# EAGLE board FRA_Sensor_v1 (EAGLE 7.6.0), part 1 of 2
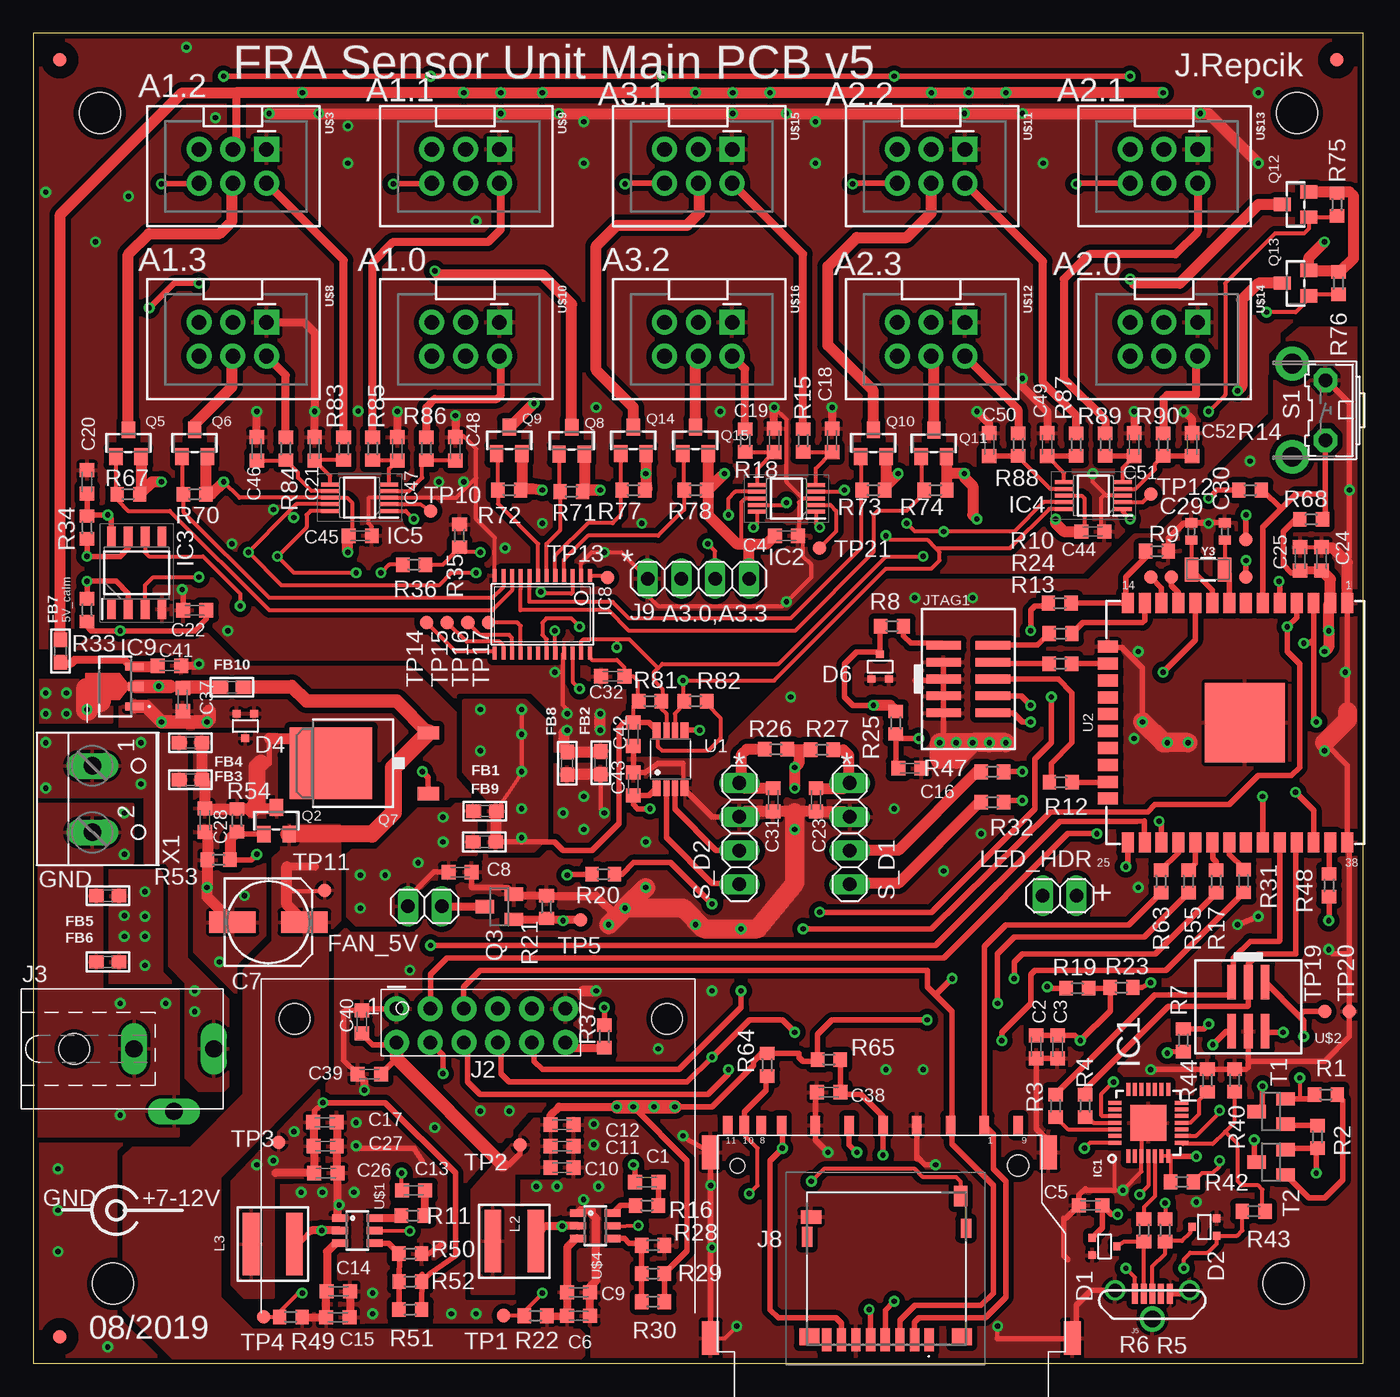
[diagram p0: board, top side]
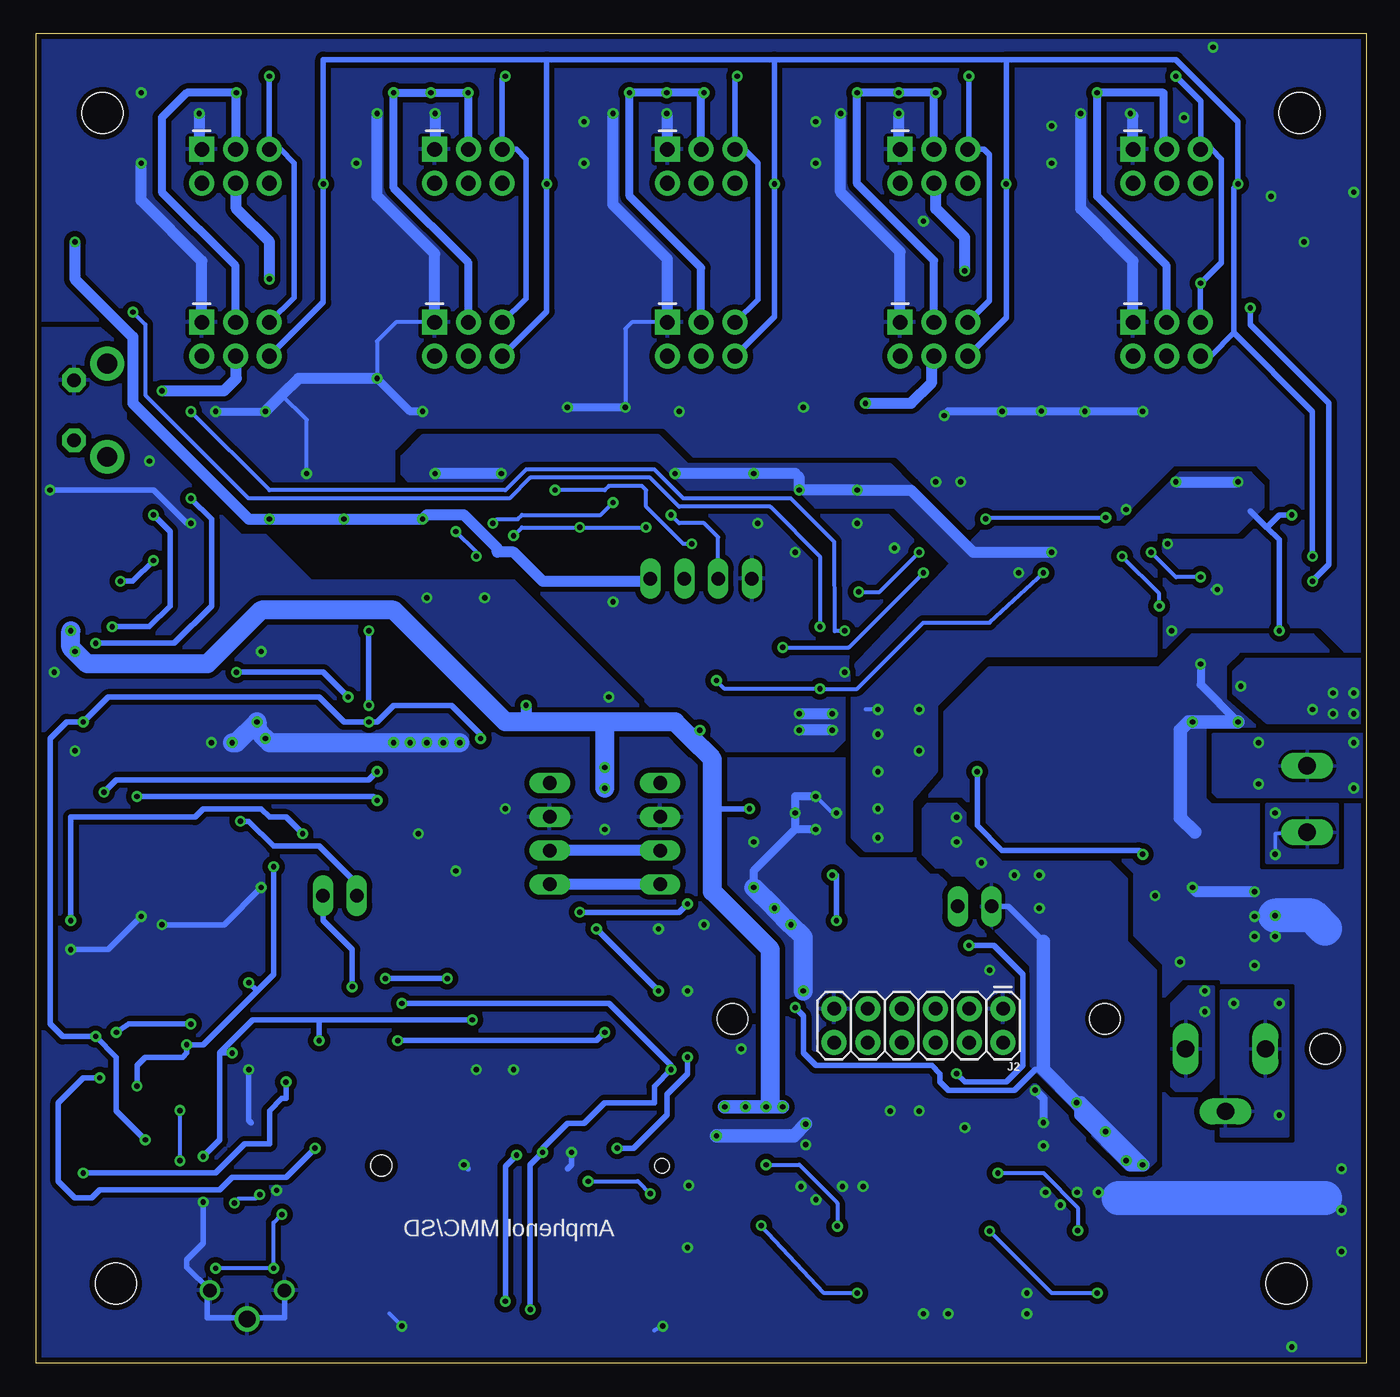
[diagram p1: board, bottom side, seen from below]

Size 100 x 100 mm. Coordinates in mm from the lower left corner, seen from the top.
Outline: 0,0 100,0 100,100 0,100 0,0
Copper layers (1*16): Top 0.035mm / dielectric 1.6mm / Bottom 0.035mm
Design rules "AllPCB": minimum track width 6mil, minimum drill 0.399mm, track to track 0.149859375mm, track to pad 0.149859375mm, pad to pad 8mil, via to via 17mil, smd to smd 6mil, copper to edge 10mil, drill to drill 24mil, minimum pad ring 10mil, minimum via ring 8mil, stop-mask expansion 4mil, vias tented up to drill 0.3mm, thermal gap 10mil
Holes 3.1 mm at 6,6 5,94 95,94 94,6
tKeepout: area 3.5,3.5 to 8.5,8.5; area 91.5,3.5 to 96.5,8.5; area 92.5,91.5 to 97.5,96.5; area 2.5,91.5 to 7.5,96.5; area 17.6,23.9 to 21.6,27.9; area 45.6,23.9 to 49.6,27.9
tRestrict: area 18.7,42.2 to 21.6,45.7

## Footprints (pad centres in the part's own frame; a part is rotated, then mirrored left to right if it is on the bottom)
C0603K = smd 1.05 x 1.08: 1 -0.875,0; 2 0.875,0
153CLV-0605 = smd 3.5 x 1.6: + 2.7,0; - -2.7,0
C0402 = smd 0.7 x 0.9: 1 -0.65,0; 2 0.65,0
SOT323-R = smd 0.6 x 0.55: 1 -0.65,-0.925; 2 0.65,-0.925; 3 0,0.925
1X02 = drill 1.016 long: 1 -1.27,0; 2 1.27,0
0603 = smd 1.1 x 1: 1 -0.85,0; 2 0.85,0
FIDUCIAL_1MM = smd 1 x 1: 1 0,0
MLP28 = smd 1 x 0.3: 1 -2.5,1.5; 2 -2.5,1; 3 -2.5,0.5; 4 -2.5,0; 5 -2.5,-0.5; 6 -2.5,-1; 7 -2.5,-1.5; 15 2.5,-1.5; 16 2.5,-1; 17 2.5,-0.5; 18 2.5,0; 19 2.5,0.5; 20 2.5,1; 21 2.5,1.5 | smd 0.3 x 1: 8 -1.5,-2.5; 9 -1,-2.5; 10 -0.5,-2.5; 11 0,-2.5; 12 0.5,-2.5; 13 1,-2.5; 14 1.5,-2.5; 22 1.5,2.5; 23 1,2.5; 24 0.5,2.5; 25 0,2.5; 26 -0.5,2.5; 27 -1,2.5; 28 -1.5,2.5 | smd 2.7 x 2.7: EXP 0,0
SOP50P490X110-10N = smd 1.4 x 0.3: 1 -2.2,1; 2 -2.2,0.5; 3 -2.2,0; 4 -2.2,-0.5; 5 -2.2,-1; 6 2.2,-1; 7 2.2,-0.5; 8 2.2,0; 9 2.2,0.5; 10 2.2,1
SOIC127P600X175-8N = smd 1.528 x 0.65: 1 -2.711,1.905; 2 -2.711,0.635; 3 -2.711,-0.635; 4 -2.711,-1.905; 5 2.711,-1.905; 6 2.711,-0.635; 7 2.711,0.635; 8 2.711,1.905
TSSOP24 = smd 0.305 x 0.991: 1 -3.575,-2.918; 2 -2.925,-2.918; 3 -2.275,-2.918; 4 -1.625,-2.918; 5 -0.975,-2.918; 6 -0.325,-2.918; 7 0.325,-2.918; 8 0.975,-2.918; 9 1.625,-2.918; 10 2.275,-2.918; 11 2.925,-2.918; 12 3.575,-2.918; 13 3.575,2.918; 14 2.925,2.918; 15 2.275,2.918; 16 1.625,2.918; 17 0.975,2.918; 18 0.325,2.918; 19 -0.325,2.918; 20 -0.975,2.918; 21 -1.625,2.918; 22 -2.275,2.918; 23 -2.925,2.918; 24 -3.575,2.918
ST-SOT-89 = smd 0.57 x 1.4: 1 -1.5,-1.475; 3 1.5,-1.475 | smd 0.65 x 1.2: 2 0,-1.575
2X6 = drill 1.016 pad 1.88: 1 0,0; 2 0,2.54; 3 2.54,0; 4 2.54,2.54; 5 5.08,0; 6 5.08,2.54; 7 7.62,0; 8 7.62,2.54; 9 10.16,0; 10 10.16,2.54; 11 12.7,0; 12 12.7,2.54
PJ-059A = drill 1.3 pad 1.8 long: 1 3,0; 2 -3,0; 3 0,-4.7 | hole 2.3: -7.5,0
SDCMF-10915W010 = smd 0.711 x 1.422: 1 7.366,13.462; 2 4.826,13.462; 3 2.286,13.462; 4 -0.254,13.462; 5 -2.794,13.462; 6 -5.334,13.462; 7 -7.874,13.462; 8 -9.398,13.462; 9 9.906,13.462; 10 -10.668,13.462; 11 -11.938,13.462 | smd 1.27 x 2.54: M1 12.192,11.43; M2 13.97,-2.54; M3 -13.208,-2.54; M4 -13.208,11.43 | hole 1.6: 9.906,10.414 | hole 1.1: -11.176,10.414
USB-B-MICRO-SMD_VERT = smd 0.45 x 1.5: D+ 0,0; D- -0.65,0; GND 1.3,0; ID 0.65,0; VBUS -1.3,0 | drill 1.016: P1 -2.8,0.25; P2 2.8,0.25 | drill 1.27: P3 0,-1.9
1140084168 = smd 0.7 x 1.75: 1 3.275,-5.35; 2 2.175,-5.35; 3 1.075,-5.35; 4 -0.025,-5.35; 5 -1.125,-5.35; 6 -2.225,-5.35; 7 -3.325,-5.35; 8 -4.425,-5.35 | smd 1.5 x 1.3: 9 -5.725,-5.125; 10 5.725,-5.125 | smd 0.8 x 1.5: 11 -5.9,2.375 | smd 0.8 x 1.4: 12 6.05,3.025 | smd 1.55 x 1: CD1 -5.6,3.875 | smd 1 x 1.55: CD2 5.65,5.45
1X04 = drill 1.016 long: 1 -3.81,0; 2 -1.27,0; 3 1.27,0; 4 3.81,0
2X05_1.27MM_SMT = smd 0.65 x 2.6: 1 -2.54,-1.85; 2 -2.54,1.85; 3 -1.27,-1.85; 4 -1.27,1.85; 5 0,-1.85; 6 0,1.85; 7 1.27,-1.85; 8 1.27,1.85; 9 2.54,-1.85; 10 2.54,1.85
SRP5030CA = smd 1.25 x 4.7: P$1 -1.625,0; P$2 1.625,0
SOT23-WIDE = smd 1 x 1.27: 1 -0.95,-1; 2 0.95,-1; 3 0,1
SOT23 = smd 1 x 1.4: 1 -0.95,-1.1; 2 0.95,-1.1; 3 0,1.1
TO252 = smd 1 x 1.6: 1 -2.28,-4.8; 2 2.28,-4.8 | smd 5.4 x 6.2: 3 0,2.5
R0603 = smd 1 x 1.1: 1 -0.85,0; 2 0.85,0
B3F-31XX = drill 1.016 pad 1.778 octagon: 1 -2.261,-1.245; 2 2.261,-1.245 | drill 1.499 pad 2.54: 3 -3.505,1.245; 4 3.505,1.245
TP10R = smd 1 x 1: TP 0,0
SOT505-1 = smd 0.6 x 1.15: 1 -1.05,-2.175; 4 1.05,-2.175; 5 1.05,2.175; 8 -1.05,2.175 | smd 0.45 x 1.15: 2 -0.325,-2.175; 3 0.325,-2.175; 6 0.325,2.175; 7 -0.325,2.175
ESP-WROOM-32 = smd 0.9 x 1.5: 1 7.7,9; 2 6.43,9; 3 5.16,9; 4 3.89,9; 5 2.62,9; 6 1.35,9; 7 0.08,9; 8 -1.19,9; 9 -2.46,9; 10 -3.73,9; 11 -5,9; 12 -6.27,9; 13 -7.54,9; 14 -8.81,9; 25 -8.81,-9; 26 -7.54,-9; 27 -6.27,-9; 28 -5,-9; 29 -3.73,-9; 30 -2.46,-9; 31 -1.19,-9; 32 0.08,-9; 33 1.35,-9; 34 2.62,-9; 35 3.89,-9; 36 5.16,-9; 37 6.43,-9; 38 7.7,-9 | smd 1.5 x 0.9: 15 -10.3,5.715; 16 -10.3,4.445; 17 -10.3,3.175; 18 -10.3,1.905; 19 -10.3,0.635; 20 -10.3,-0.635; 21 -10.3,-1.905; 22 -10.3,-3.175; 23 -10.3,-4.445; 24 -10.3,-5.715 | smd 6 x 6: GND 0,0
SOT23-6 = smd 0.55 x 1.2: 1 -0.95,-1.3; 2 0,-1.3; 3 0.95,-1.3; 4 0.95,1.3; 5 0,1.3; 6 -0.95,1.3
2X03_1.27MM_SMT = smd 0.65 x 2.6: 1 -1.27,-1.85; 2 -1.27,1.85; 3 0,-1.85; 4 0,1.85; 5 1.27,-1.85; 6 1.27,1.85
WE_61200621621 = drill 1.1 pad 1.88 square: 1 -1.27,2.54 | drill 1.1 pad 1.88: 2 1.27,2.54; 3 -1.27,0; 4 1.27,0; 5 -1.27,-2.54; 6 1.27,-2.54
ETH_MODULE_OUTLINE_SMALL = hole 2.3: 2.5,47.5; 30.5,47.5
W237-102 = drill 1.3 long: 1 -2.5,-1.27; 2 2.5,-1.27
CRYSTAL-SMD-3.2X1.5MM = smd 1 x 1.8: P$1 -1.25,0; P$2 1.25,0

## Placement (x,y rotation side)
C1  100n  [C0603K]  46.13,13.64 180 top
C2  10u  [C0603K]  75.41,23.8 270 top
C3  100n  [C0603K]  77.01,23.8 270 top
C4  100n  [C0603K]  56.63,62.23 0 top
C5  100n  [C0603K]  79.5,11.89 180 top
C6  10u/25V  [C0603K]  41,3.58 0 top
C7  220u/25V  [153CLV-0605]  17.68,33.17 0 top
C8  10u  [C0603K]  32.09,36.93 0 top
C9  100n  [C0603K]  41,5.35 0 top
C10  10u/25V  [C0603K]  39.75,14.73 0 top
C11  10u  [C0603K]  39.75,16.34 0 top
C12  100n  [C0603K]  39.75,17.95 0 top
C13  100n  [C0603K]  28.59,13.02 180 top
C14  10u/25V  [C0603K]  22.94,5.42 0 top
C15  100n  [C0603K]  22.9,3.47 0 top
C16  100n  [C0603K]  65.91,44.74 0 top
C17  10u  [C0603K]  21.93,18.13 0 top
C18  100n  [C0603K]  60.05,69.39 90 top
C19  DNI  [C0603K]  55.7,69.39 90 top
C20  10u  [C0603K]  4.04,66.27 90 top
C21  100n  [C0603K]  21.16,68.76 90 top
C22  100n  [C0603K]  12.13,56.63 180 top
C23  100n  [C0603K]  58.84,42.37 270 top
C24  10u  [C0603K]  96.86,60.49 90 top
C25  10u  [C0603K]  95.24,60.49 90 top
C26  10u  [C0603K]  22.01,14.31 0 top
C27  100n  [C0603K]  21.95,16.34 0 top
C28  100n  [C0603K]  12.9,40.83 270 top
C29  DNI  [C0402]  87.05,62.55 90 top
C30  DNI  [C0402]  89.59,62.55 90 top
C31  100n  [C0603K]  55.63,42.37 270 top
C32  100n  [C0603K]  43.56,51.65 180 top
C37  10u/25V  [C0603K]  11.24,49.92 270 top
C38  100n  [C0603K]  59.8,20.39 180 top
C39  10u  [C0603K]  25.26,21.75 180 top
C40  100n  [C0603K]  24.71,25.67 90 top
C41  10u  [C0603K]  10.23,52.45 0 top
C42  100n  [C0603K]  45.12,47.29 270 top
C43  100n  [C0603K]  45.12,43.56 90 top
C44  100n  [C0603K]  79.65,62.54 0 top
C45  100n  [C0603K]  24.58,62.23 0 top
C46  100n  [C0603K]  16.8,68.76 90 top
C47  100n  [C0603K]  27.38,68.76 90 top
C48  100n  [C0603K]  31.74,68.76 90 top
C49  100n  [C0603K]  76.23,69.08 90 top
C50  100n  [C0603K]  71.88,69.08 90 top
C51  100n  [C0603K]  82.77,69.08 90 top
C52  100n  [C0603K]  87.12,69.08 90 top
D1  PESD1CANSC70  [SOT323-R]  80.54,8.8 270 top
D2  PESD1CANSC70  [SOT323-R]  88.04,10.25 90 top
D4  PESD1CANSC70  [SOT323-R]  15.94,47.92 180 top
D6  PESD1CANSC70  [SOT323-R]  63.67,52.38 0 top
DRILEGEND  [DRILEGEND]  -2.41,-26.42 0 top  (outside the outline)
FAN_5V  2pin  [1X02]  29.44,34.36 180 top
FB1  [0603]  33.95,41.52 0 top
FB2  [0603]  42.67,45.15 90 top
FB3  [0603]  11.82,43.87 0 top
FB4  [0603]  11.82,46.67 0 top
FB5  [0603]  5.6,35.16 0 top
FB6  [0603]  5.6,30.18 0 top
FB7  [0603]  2.04,53.56 90 top
FB8  [0603]  40.14,45.12 90 top
FB9  [0603]  33.92,39.2 0 top
FB10  [0603]  14.94,50.84 180 top
FID1  FIDUCIAL""  [FIDUCIAL_1MM]  2,98 0 top
FID2  FIDUCIAL""  [FIDUCIAL_1MM]  98,98 0 top
FID4  FIDUCIAL""  [FIDUCIAL_1MM]  2,2 0 top
IC1  CP2101  [MLP28]  83.82,18.1 90 top
IC2  ADS1115IDGSR  [SOP50P490X110-10N]  56.63,65.03 180 top
IC3  P82B715DR  [SOIC127P600X175-8N]  7.78,59.43 90 top
IC4  ADS1115IDGSR  [SOP50P490X110-10N]  79.7,65.24 180 top
IC5  ADS1115IDGSR  [SOP50P490X110-10N]  24.54,65.09 180 top
IC8  PCA9555PW  [TSSOP24]  38.27,56.32 180 top
IC9  LDK320ADU50R  [ST-SOT-89]  6.15,50.89 90 top
J2  ETH_CONN  [2X6]  27.3,26.67 180 bottom
J3  PJ-059A  [PJ-059A]  10.58,23.65 0 top
J4  DNI  [SDCMF-10915W010]  64.14,4.45 0 top
J5  WM9734TR-ND  [USB-B-MICRO-SMD_VERT]  84.13,5.24 0 top
J8  1140084168  [1140084168]  64.08,7.13 0 top
J9  4pin  [1X04]  50,59 0 top
JTAG1  DNI  [2X05_1.27MM_SMT]  70.29,51.45 270 top
L2  SRP5030CA-1R5M  [SRP5030CA]  36.17,9.18 180 top
L3  SRP5030CA-1R5M  [SRP5030CA]  18.01,8.97 180 top
LED_HDR  2pin  [1X02]  77.17,35.16 0 top
Q2  FDN306P  [SOT23-WIDE]  18.28,40.79 0 top
Q3  Si2300DS  [SOT23]  35.04,34.33 90 top
Q5  FDN306P  [SOT23-WIDE]  7.16,69.19 0 top
Q6  FDN306P  [SOT23-WIDE]  12.13,69.19 0 top
Q7  DNI  [TO252]  24.89,45.12 90 top
Q8  FDN306P  [SOT23-WIDE]  40.48,69.37 0 top
Q9  FDN306P  [SOT23-WIDE]  35.78,69.39 0 top
Q10  FDN306P  [SOT23-WIDE]  63.16,69.19 0 top
Q11  FDN306P  [SOT23-WIDE]  67.71,69.17 0 top
Q12  FDN306P  [SOT23-WIDE]  94.9,87.12 90 top
Q13  FDN306P  [SOT23-WIDE]  94.9,81.21 90 top
Q14  FDN306P  [SOT23-WIDE]  45.12,69.39 0 top
Q15  FDN306P  [SOT23-WIDE]  49.78,69.39 0 top
R1  12k  [R0603]  97.18,20.21 180 top
R2  12k  [R0603]  96.55,17.04 270 top
R3  100  [R0603]  76.85,19.37 270 top
R4  0  [R0603]  79.06,19.37 270 top
R5  0  [R0603]  85.08,10 90 top
R6  0  [R0603]  83.49,10 90 top
R7  0  [R0603]  86.46,24.29 90 top
R8  0  [R0603]  64.57,55.43 180 top
R9  100k  [R0603]  84.48,61.07 0 top
R10  100  [R0603]  77.17,57.16 0 top
R11  0  [R0603]  28.53,11.13 180 top
R12  100  [R0603]  77.24,43.69 0 top
R13  100  [R0603]  77.22,52.6 0 top
R14  DNI  [R0603]  91.48,65.65 0 top
R15  10k  [R0603]  57.87,69.39 90 top
R16  0  [R0603]  46.13,11.87 180 top
R17  47  [R0603]  88.93,36.23 270 top
R18  10k  [R0603]  53.52,69.39 90 top
R19  100  [R0603]  78.49,28.2 0 top
R20  47  [R0603]  42.86,36.78 180 top
R21  100k  [R0603]  38.59,34.31 90 top
R22  10k  [R0603]  37.76,3.58 0 top
R23  DNI  [R0603]  81.82,28.27 0 top
R24  100  [R0603]  77.23,54.87 0 top
R25  10k  [R0603]  64.84,48.16 90 top
R26  10  [R0603]  55.84,46.17 180 top
R27  10  [R0603]  59.29,46.13 0 top
R28  10k/1%  [R0603]  46.6,8.88 0 top
R29  DNI  [R0603]  46.6,6.76 0 top
R30  45.3k  [R0603]  46.6,4.64 0 top
R31  47  [R0603]  90.99,36.26 270 top
R32  0  [R0603]  72.11,42.19 180 top
R33  330  [R0603]  4.04,56.63 90 top
R34  330  [R0603]  4.04,62.85 270 top
R35  0  [R0603]  32.05,62.23 90 top
R36  DNI  [R0603]  28.63,60.05 0 top
R37  DNI  [R0603]  42.94,24.58 90 top
R40  DNI  [R0603]  88.27,21.27 270 top
R42  10k  [R0603]  86.36,13.65 0 top
R43  0  [R0603]  91.75,11.44 180 top
R44  DNI  [R0603]  90.33,21.29 270 top
R47  0  [R0603]  72.11,44.47 180 top
R48  47  [R0603]  97.42,35.95 270 top
R49  10k  [R0603]  19.37,3.49 0 top
R50  10k/1%  [R0603]  28.35,8.25 0 top
R51  DNI  [R0603]  28.34,4.05 0 top
R52  73.2k  [R0603]  28.35,6.17 0 top
R53  100k  [R0603]  13.94,37.87 180 top
R54  100k  [R0603]  15.32,40.83 270 top
R55  47  [R0603]  86.85,36.23 270 top
R63  47  [R0603]  84.78,36.23 270 top
R64  10k  [R0603]  55.18,22.45 90 top
R65  0  [R0603]  59.82,22.84 180 top
R67  10k  [R0603]  7.16,65.34 180 top
R68  10k  [R0603]  96.07,63.46 180 top
R70  10k  [R0603]  12.13,65.34 180 top
R71  10k  [R0603]  40.45,65.54 180 top
R72  10k  [R0603]  35.78,65.65 180 top
R73  10k  [R0603]  63.16,65.65 180 top
R74  10k  [R0603]  67.83,65.65 180 top
R75  10k  [R0603]  98.01,87.12 270 top
R76  10k  [R0603]  98.12,81.21 270 top
R77  10k  [R0603]  45.12,65.65 180 top
R78  10k  [R0603]  49.78,65.65 180 top
R81  2k2  [R0603]  46.36,49.78 0 top
R82  2k2  [R0603]  49.78,49.78 180 top
R83  10k  [R0603]  23.34,68.76 90 top
R84  10k  [R0603]  18.98,68.76 90 top
R85  10k  [R0603]  25.51,68.76 90 top
R86  10k  [R0603]  29.56,68.76 90 top
R87  10k  [R0603]  78.41,69.08 90 top
R88  10k  [R0603]  74.05,69.08 90 top
R89  10k  [R0603]  80.59,69.08 90 top
R90  10k  [R0603]  84.94,69.08 90 top
S1  [B3F-31XX]  95.9,71.66 90 top
S_D1  4pin  [1X04]  61.38,39.83 270 top
S_D2  4pin  [1X04]  53.09,39.83 270 top
T1  BC847  [SOT23]  93.05,18.94 90 top
T2  BC847  [SOT23]  93.05,15.13 90 top
TP1  TPTP10R  [TP10R]  35.38,3.6 0 top
TP2  TPTP10R  [TP10R]  36.61,16.43 0 top
TP3  TPTP10R  [TP10R]  18.46,16.63 0 top
TP4  TPTP10R  [TP10R]  17.32,3.52 0 top
TP5  TPTP10R  [TP10R]  41.15,33.34 0 top
TP6  TPTP10R  [TP10R]  91.17,59.12 0 top
TP7  TPTP10R  [TP10R]  91.17,61.92 0 top
TP8  TPTP10R  [TP10R]  85.57,59.12 0 top
TP9  TPTP10R  [TP10R]  84.01,59.12 0 top
TP10  TPTP10R  [TP10R]  29.87,64.1 0 top
TP11  TPTP10R  [TP10R]  21.9,35.56 0 top
TP12  TPTP10R  [TP10R]  84.01,65.34 0 top
TP13  TPTP10R  [TP10R]  43.16,59.07 0 top
TP14  TPTP10R  [TP10R]  29.56,55.7 0 top
TP15  TPTP10R  [TP10R]  31.11,55.7 0 top
TP16  TPTP10R  [TP10R]  32.67,55.7 0 top
TP17  TPTP10R  [TP10R]  34.23,55.7 0 top
TP19  TPTP10R  [TP10R]  97.08,26.45 0 top
TP20  TPTP10R  [TP10R]  98.95,26.45 0 top
TP21  TPTP10R  [TP10R]  59.12,61.3 0 top
U1  PCA9509DP  [SOT505-1]  47.92,45.43 0 top
U2  ESP-WROOM-32  [ESP-WROOM-32]  91.09,48.17 0 top
U$1  TPS563249DDCR  [SOT23-6]  24.36,9.99 270 top
U$2  DNI  [2X03_1.27MM_SMT]  91.34,26.82 180 top
U$3  CONN_03X2_WE_61200621621  [WE_61200621621]  15,90 270 top
U$4  TPS563249DDCR  [SOT23-6]  42.26,10.34 270 top
U$7  ETH_MODULE_OUTLINE  [ETH_MODULE_OUTLINE_SMALL]  17.14,-21.59 0 top
U$8  CONN_03X2_WE_61200621621  [WE_61200621621]  15,77 270 top
U$9  CONN_03X2_WE_61200621621  [WE_61200621621]  32.5,90 270 top
U$10  CONN_03X2_WE_61200621621  [WE_61200621621]  32.5,77 270 top
U$11  CONN_03X2_WE_61200621621  [WE_61200621621]  67.5,90 270 top
U$12  CONN_03X2_WE_61200621621  [WE_61200621621]  67.5,77 270 top
U$13  CONN_03X2_WE_61200621621  [WE_61200621621]  85,90 270 top
U$14  CONN_03X2_WE_61200621621  [WE_61200621621]  85,77 270 top
U$15  CONN_03X2_WE_61200621621  [WE_61200621621]  50,90 270 top
U$16  CONN_03X2_WE_61200621621  [WE_61200621621]  50,77 270 top
X1  TB001-500-02BE  [W237-102]  5.71,42.43 270 top
Y3  DNI  [CRYSTAL-SMD-3.2X1.5MM]  88.32,59.69 0 top

## Library data of the parts
C1 C3-C5 C9 C12 C13 C15 C16 C18 C19 C21-C23 C27 C28 C31 C32 C38 C40 C42-C52 = resistor; PARTNO: CC0603KRX7R8BB104
C2 C8 C11 C17 C20 C24-C26 C39 C41 = resistor; PARTNO: GRM188R61A106KE69J
C6 C10 C14 C37 = resistor; PARTNO: GRM188R61E106KA73J
C7 = resistor; PARTNO: EMZR250ARA221MF80G
C29 C30 = resistor; PARTNO: C0402C220J5GAC7411
D1 D2 D4 D6 = diode; PARTNO: PESD1CAN-UX
DRILEGEND = drilegend
FAN_5V LED_HDR = pinhead; PARTNO: TSW-102-07-G-S
FB1-FB10 = microbuilder; PARTNO: BLM18PG121SN1D
FID1 FID2 FID4 Q7 = microbuilder
IC1 = SparkFun-Retired; PARTNO: CP2101-GM; PROD_ID: COM-00310
IC2 IC4 IC5 = SamacSys_Parts; DESCRIPTION: Automotive 16-Bit 860SPS 4-Ch Delta-Sigma ADC With PGA, Oscillator, VREF, Comparator, and I2C; HEIGHT: 1.1mm; MANUFACTURER_NAME: Texas Instruments; MANUFACTURER_PART_NUMBER: ADS1115BQDGSRQ1; MOUSER_PART_NUMBER: 595-ADS1115BQDGSRQ1; MOUSER_PRICE-STOCK: https://www.mouser.com/Search/Refine.aspx?Keyword=595-ADS1115BQDGSRQ1; PARTNO: ADS1115IDGSR
IC3 = SamacSys_Parts; DESCRIPTION: I2C Bus Extender; HEIGHT: 1.75mm; MANUFACTURER_NAME: Texas Instruments; MANUFACTURER_PART_NUMBER: P82B715DR; PARTNO: P82B715DR
IC8 = micro-philips; MPN: PCA9555PW; OC_FARNELL: 1408297; OC_NEWARK: 63K6069; PARTNO: PCA9555PW,118
IC9 = SamacSys_Parts; DESCRIPTION: LDO Voltage Regulators 200 mA low quiescent current and high PSRR voltage regulator; HEIGHT: mm; MANUFACTURER_NAME: STMicroelectronics; MANUFACTURER_PART_NUMBER: LDK320ADU50R; MOUSER_PART_NUMBER: 511-LDK320ADU50R; MOUSER_PRICE-STOCK: https://www.mouser.com/Search/Refine.aspx?Keyword=511-LDK320ADU50R; PARTNO: LDK320ADU50R
J2 = SparkFun-Connectors; PARTNO: CES-106-01-T-D; PROD_ID: CONN-12423
J3 = FRA_eagle_lib; DESCRIPTION: DC Power Connectors Power Jacks; HEIGHT: 11mm; MANUFACTURER_NAME: CUI; MANUFACTURER_PART_NUMBER: PJ-059A; MOUSER_PRICE-STOCK: https://www.mouser.com/ProductDetail/CUI/PJ-059A?qs=sGAEpiMZZMtnOp%252BbbqA009lE0K0K%252BPZGgL2j%2Fo1XCBQtBpzQrCB9dQ%3D%3D; PARTNO: PJ-059A
J4 = sd-mmc; PARTNO: GSD090012SEU
J5 = SparkFun-Connectors; PARTNO: 105133-0001; PROD_ID: CONN-13534
J8 = SamacSys_Parts; DESCRIPTION: Memory Card Connectors Micro SD 8 Pin PCB Gold; HEIGHT: 1.68mm; MANUFACTURER_NAME: Amphenol; MANUFACTURER_PART_NUMBER: 1140084168; MOUSER_PART_NUMBER: 523-114-00841-68; PARTNO: 1140084168
J9 S_D1 S_D2 = pinhead; PARTNO: 61300411121
JTAG1 = microbuilder; PARTNO: M50-3600542R
L2 L3 = FRA_eagle_lib; PARTNO: SRP5030CA-1R5M
Q2 Q5 Q6 Q8-Q15 = microbuilder; PARTNO: FDN306P
Q3 = adafruit; PARTNO: SI2300DS-T1-GE3
R1 R2 = resistor; PARTNO: RC0603FR-0712KL
R3 R10 R12 R13 R19 R24 = resistor; PARTNO: CRCW0603100RFKEAC
R4-R8 R11 R14 R16 R23 R32 R35 R37 R40 R43 R44 R47 R65 = resistor; PARTNO: CRCW06030000Z0EAC
R9 R21 R53 R54 = resistor; PARTNO: CRCW0603100KFKEAC
R15 R18 R22 R25 R42 R49 R64 R67 R68 R70-R78 R83-R90 = resistor; PARTNO: CRCW060310K0JNEAC
R17 R20 R31 R48 R55 R63 = resistor; PARTNO: CRCW060347R0FKEAC
R26 R27 = resistor; PARTNO: CRCW060310R0FKEAC
R28 R50 = resistor; PARTNO: RN73R1JTTD1002D25
R29 R51 = resistor
R30 = resistor; PARTNO: ERJ-PB3D4532V
R33 R34 R36 = resistor; PARTNO: CRCW0603330RFKEAC
R52 = resistor; PARTNO: ERJ-PB3D7322V
R81 R82 = resistor; PARTNO: RCS06032K20JNEA
S1 = adafruit; PARTNO: FSMRA5JH
T1 T2 = transistor-neu-to92; PARTNO: BC847A-TP
TP1-TP17 TP19-TP21 = testpad
U1 = nxp_60; PARTNO: PCA9509DP,118
U2 = SparkFun-RF; PARTNO: ESP32-WROOM-32; PROD_ID: IC-13849
U$1 U$4 = FRA_eagle_lib; PARTNO: TPS563249DDCR
U$2 = FRA_eagle_lib; PARTNO: HTMS-103-03-T-D-SM
U$3 U$8-U$16 = FRA_eagle_lib; PARTNO: 61200621621
U$7 = FRA_eagle_lib
X1 = con-wago-500; MPN: 237-102; OC_FARNELL: unknown; OC_NEWARK: 70K9898; PARTNO: TB001-500-02BE
Y3 = SparkFun-Clocks; PARTNO: FC-135 32.7680KA-A3; PROD_ID: XTAL-13062

## Nets
1AIN0: C21.1 IC5.6 R83.1
1AIN1: C46.1 IC5.7 R84.1
1AIN2: C47.1 IC5.5 R85.1
1AIN3: C48.1 IC5.4 R86.1
2AIN0: C49.1 IC4.6 R87.1
2AIN1: C50.1 IC4.7 R88.1
2AIN2: C51.1 IC4.5 R89.1
2AIN3: C52.1 IC4.4 R90.1
3.3V: C2.1 C3.1 C10.1 C11.1 C12.1 C24.1 C25.1 C39.1 C40.1 C43.1 D6.3 IC1.6 IC1.7 J2.2 L2.P$2 R7.1 R8.2 R19.2 R23.1 R25.2 R26.1 R27.1 R29.2 R30.2 R42.1 R64.2 R65.2 R68.2 TP2.TP U1.1 U1.5 U2.2
3AIN0: C18.1 IC2.5 R15.1
3AIN1: C19.1 IC2.6 R18.1
5V: C8.1 C17.1 C26.1 C27.1 FAN_5V.2 FB1.1 FB9.1 L3.P$2 R37.2 R51.2 R52.2 TP3.TP
5V_CALM: FB7.2 U$3.3 U$8.3 U$9.3 U$10.3 U$11.3 U$12.3 U$13.3 U$14.3 U$15.3 U$16.3
5V_CALM_LDO: C41.1 FB7.1 IC9.3
+5V/1: C4.1 C20.1 C22.1 C32.1 C42.1 C44.1 C45.1 FB1.2 FB9.2 IC2.8 IC3.8 IC4.1 IC4.8 IC5.8 IC8.24 J9.4 Q5.2 Q6.2 Q8.2 Q9.2 Q10.2 Q11.2 Q12.2 Q13.2 Q14.2 Q15.2 R33.1 R34.1 R36.1 R67.1 R70.1 R71.1 R72.1 R73.1 R74.1 R75.1 R76.1 R77.1 R78.1 R81.1 R82.1 U1.8
ACTIVE: IC1.11 R40.2
ADC1_1: R83.2 U$3.2
ADC1_2: R84.2 U$8.2
ADC1_3: R85.2 U$9.2
ADC1_4: R86.2 U$10.2
ADC2_1: R87.2 U$11.2
ADC2_2: R88.2 U$12.2
ADC2_3: R89.2 U$13.2
ADC2_4: R90.2 U$14.2
ADC3_1: R15.2 U$15.2
ADC3_2: R18.2 U$16.2
AGND: C4.2 C18.2 C19.2 C20.2 C21.2 C22.2 C32.2 C44.2 C45.2 C46.2 C47.2 C48.2 C49.2 C50.2 C51.2 C52.2 FB2.2 FB8.2 IC2.3 IC3.4 IC4.3 IC5.3 IC8.2 IC8.12 IC8.21 J9.1 R35.2 U$3.1 U$8.1 U$9.1 U$10.1 U$11.1 U$12.1 U$13.1 U$14.1 U$15.1 U$16.1
BTN1: R14.2 R68.1 S1.1 U2.6
D_N_: D1.3 J5.D- R6.1
D_N_CP: IC1.5 R6.2
D_P_: D2.3 J5.D+ R5.1
D_P_CP: IC1.4 R5.2
DTR: IC1.28 R1.2 T1.2
EN_IF1: Q5.3 U$3.4
EN_IF2: Q6.3 U$8.4
EN_IF3: Q8.3 U$9.4
EN_IF4: Q9.3 U$10.4
EN_IF5: Q10.3 U$11.4
EN_IF6: Q11.3 U$12.4
EN_IF7: Q12.3 U$13.4
EN_IF8: Q13.3 U$14.4
EN_IF9: Q14.3 U$15.4
EN_IF10: Q15.3 U$16.4
ENB_PWR_IF1: IC8.10 Q5.1 R67.2
ENB_PWR_IF2: IC8.11 Q6.1 R70.2
ENB_PWR_IF3: IC8.6 Q8.1 R71.2
ENB_PWR_IF4: IC8.7 Q9.1 R72.2
ENB_PWR_IF5: IC8.8 Q10.1 R73.2
ENB_PWR_IF6: IC8.9 Q11.1 R74.2
ENB_PWR_IF7: IC8.20 Q12.1 R75.2
ENB_PWR_IF8: IC8.19 Q13.1 R76.2
ENB_PWR_IF9: IC8.5 Q14.1 R77.2
ENB_PWR_IF10: IC8.4 Q15.1 R78.2
ETH_5V: J2.12 R37.1
ETH_CLKOUT: J2.9
ETH_CS: J2.3 R48.2
ETH_INT: J2.10 TP7.TP U2.4
ETH_RST: J2.4 U2.26
ETH_WOL: J2.7
FAN: Q3.1 R20.2 R21.1 TP5.TP
FAN_MCU: R20.1 U2.10
GND: C2.2 C3.2 C5.2 C6.2 C7.- C8.2 C9.2 C10.2 C11.2 C12.2 C14.2 C15.2 C16.2 C17.2 C23.2 C24.2 C25.2 C26.2 C27.2 C28.2 C29.2 C30.2 C31.2 C37.2 C38.2 C39.2 C40.2 C41.2 C42.2 C43.2 D1.2 D2.2 D4.1 D4.2 D6.1 D6.2 FB2.1 FB5.2 FB6.2 FB8.1 IC1.3 IC1.EXP IC9.1 J2.1 J2.11 J4.3 J4.6 J4.M1 J4.M2 J4.M3 J4.M4 J5.GND J5.P1 J5.P2 J5.P3 J8.6 J8.CD1 JTAG1.3 JTAG1.5 JTAG1.7 JTAG1.9 Q3.2 R9.2 R21.2 R28.2 R40.1 R44.1 R50.2 R53.2 S1.2 S_D1.2 S_D2.2 TP20.TP U1.4 U2.1 U2.15 U2.38 U2.GND U$1.1 U$2.4 U$4.1
GNDIN: FB5.1 FB6.1 J3.2 J3.3 X1.2
GPIO0: R23.2 T1.3 U2.25 U$2.6
IN5VLDO: C37.1 FB10.2 IC9.2
LED: LED_HDR.1 U2.27
MISO: J2.8 J4.7 J8.7 R31.2
MOSI: J2.5 J4.2 J8.3 R17.2
MTCK: R13.2 U2.16
MTDI: R9.1 R10.2 U2.14
MTDO: R12.2 U2.23
MTMS: R24.2 U2.13
N$1: R1.1 T2.1
N$2: R2.1 T1.1
N$3: C1.1 R16.1
N$4: C23.1 R27.2 S_D1.1
N$5: C31.1 R26.2 S_D2.1
N$6: LED_HDR.2 R19.1
N$7: IC2.2 TP21.TP
N$8: FAN_5V.1 Q3.3
N$9: IC8.13 TP14.TP
N$10: IC8.14 TP15.TP
N$11: C13.1 R11.1
N$12: IC8.15 TP16.TP
N$13: IC8.16 TP17.TP
N$14: IC2.4 J9.3
N$15: R16.2 U$4.6
N$16: IC2.7 J9.2
N$17: IC8.3 R35.1 R36.2
N$19: C1.2 L2.P$1 U$4.2
N$20: R11.2 U$1.6
N$21: C13.2 L3.P$1 U$1.2
N$22: R49.1 TP4.TP U$1.5
N$23: R22.1 TP1.TP U$4.5
N$24: R28.1 R29.1 R30.1 U$4.4
N$25: R50.1 R51.1 R52.1 U$1.4
N$29: TP6.TP U2.5
N$31: TP8.TP U2.11
N$33: TP9.TP U2.12
N$37: IC4.2 TP12.TP
N$38: IC1.9 R42.2
N$39: IC1.8 R43.1 R44.2
N$40: IC5.2 TP10.TP
N$41: IC8.1 TP13.TP
N_RTC: C29.1 U2.9 Y3.P$1
NRST: C16.1 JTAG1.10 R14.1 R25.1 T2.3 TP19.TP U2.3 U$2.1
P_RTC: C30.1 U2.8 Y3.P$2
RTS: IC1.24 R2.2 T2.2
RXD0: R3.1 U2.34 U$2.5
RXD0_CP2101IN: IC1.26 R3.2
SCL: R47.2 S_D1.3 S_D2.3 U1.3
SCL_5V: IC2.1 IC2.10 IC3.6 IC4.10 IC5.10 IC8.22 R82.2 U1.6
SCL_BUFF: IC3.7 R34.2 U$3.6 U$8.6 U$9.6 U$10.6 U$11.6 U$12.6 U$13.6 U$14.6 U$15.6 U$16.6
SCL_MCU: R47.1 U2.36
SCLK: J2.6 J4.5 J8.5 R55.2
SD_CD: J4.10 J8.CD2 R64.1
SD_CS: J4.1 J8.2 R63.2
SD_CS_MCU: R63.1 U2.28
SD_VDD: C38.1 J4.4 J8.4 R65.1
SDA: R32.2 S_D1.4 S_D2.4 U1.2
SDA_5V: IC2.9 IC3.3 IC4.9 IC5.1 IC5.9 IC8.23 R81.2 U1.7
SDA_BUFF: IC3.2 R33.2 U$3.5 U$8.5 U$9.5 U$10.5 U$11.5 U$12.5 U$13.5 U$14.5 U$15.5 U$16.5
SDA_MCU: R32.1 U2.33
TCKCONN: JTAG1.4 R13.1
TDICONN: JTAG1.8 R10.1
TDOCONN: JTAG1.6 R12.1
TMSCONN: JTAG1.2 R24.1
TXD0: R4.1 U2.35 U$2.3
TXD0_CP2101: IC1.25 R4.2
V_USB: C5.1 D1.1 D2.1 J5.VBUS R43.2
VCCJTAG: JTAG1.1 R8.1
VDDPROG: R7.2 U$2.2
VGI: Q2.1 Q7.1 R53.1 R54.2
VIN: C28.1 D4.3 FB3.2 FB4.2 Q2.3 Q7.3 R54.1
VIN_IN: FB3.1 FB4.1 J3.1 X1.1
VIN_PROTECTED: C6.1 C7.+ C9.1 C14.1 C15.1 FB10.1 Q2.2 Q7.2 R22.2 R49.2 TP11.TP U$1.3 U$4.3
VSPI_CS_ETH: R48.1 U2.37
VSPI_MISO: R31.1 U2.31
VSPI_MOSI: R17.1 U2.30
VSPI_SCK: R55.1 U2.29